# EAGLE board projeto_jcarlos (EAGLE 6.2)
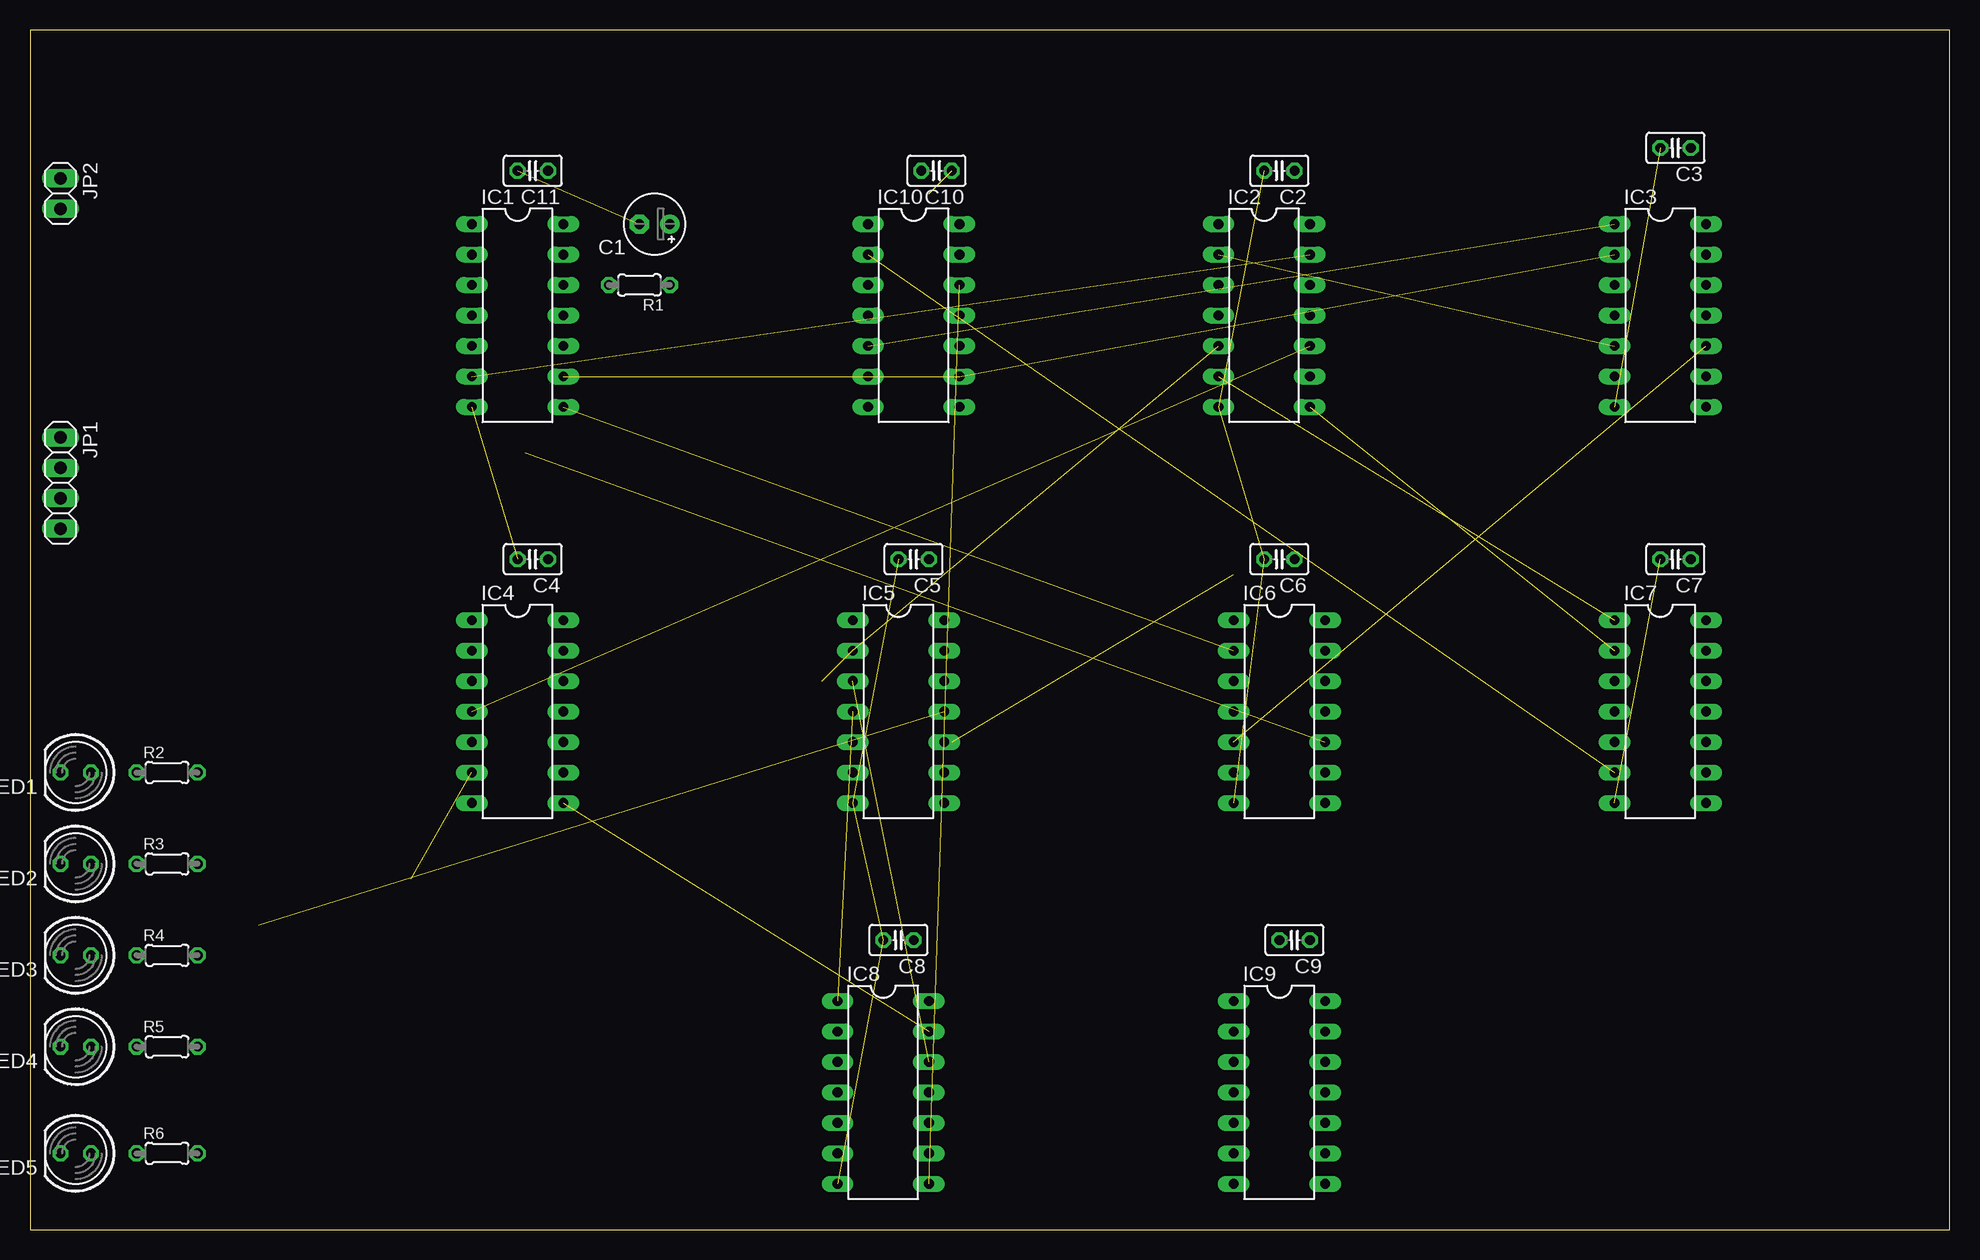
[diagram p0: board, top side]
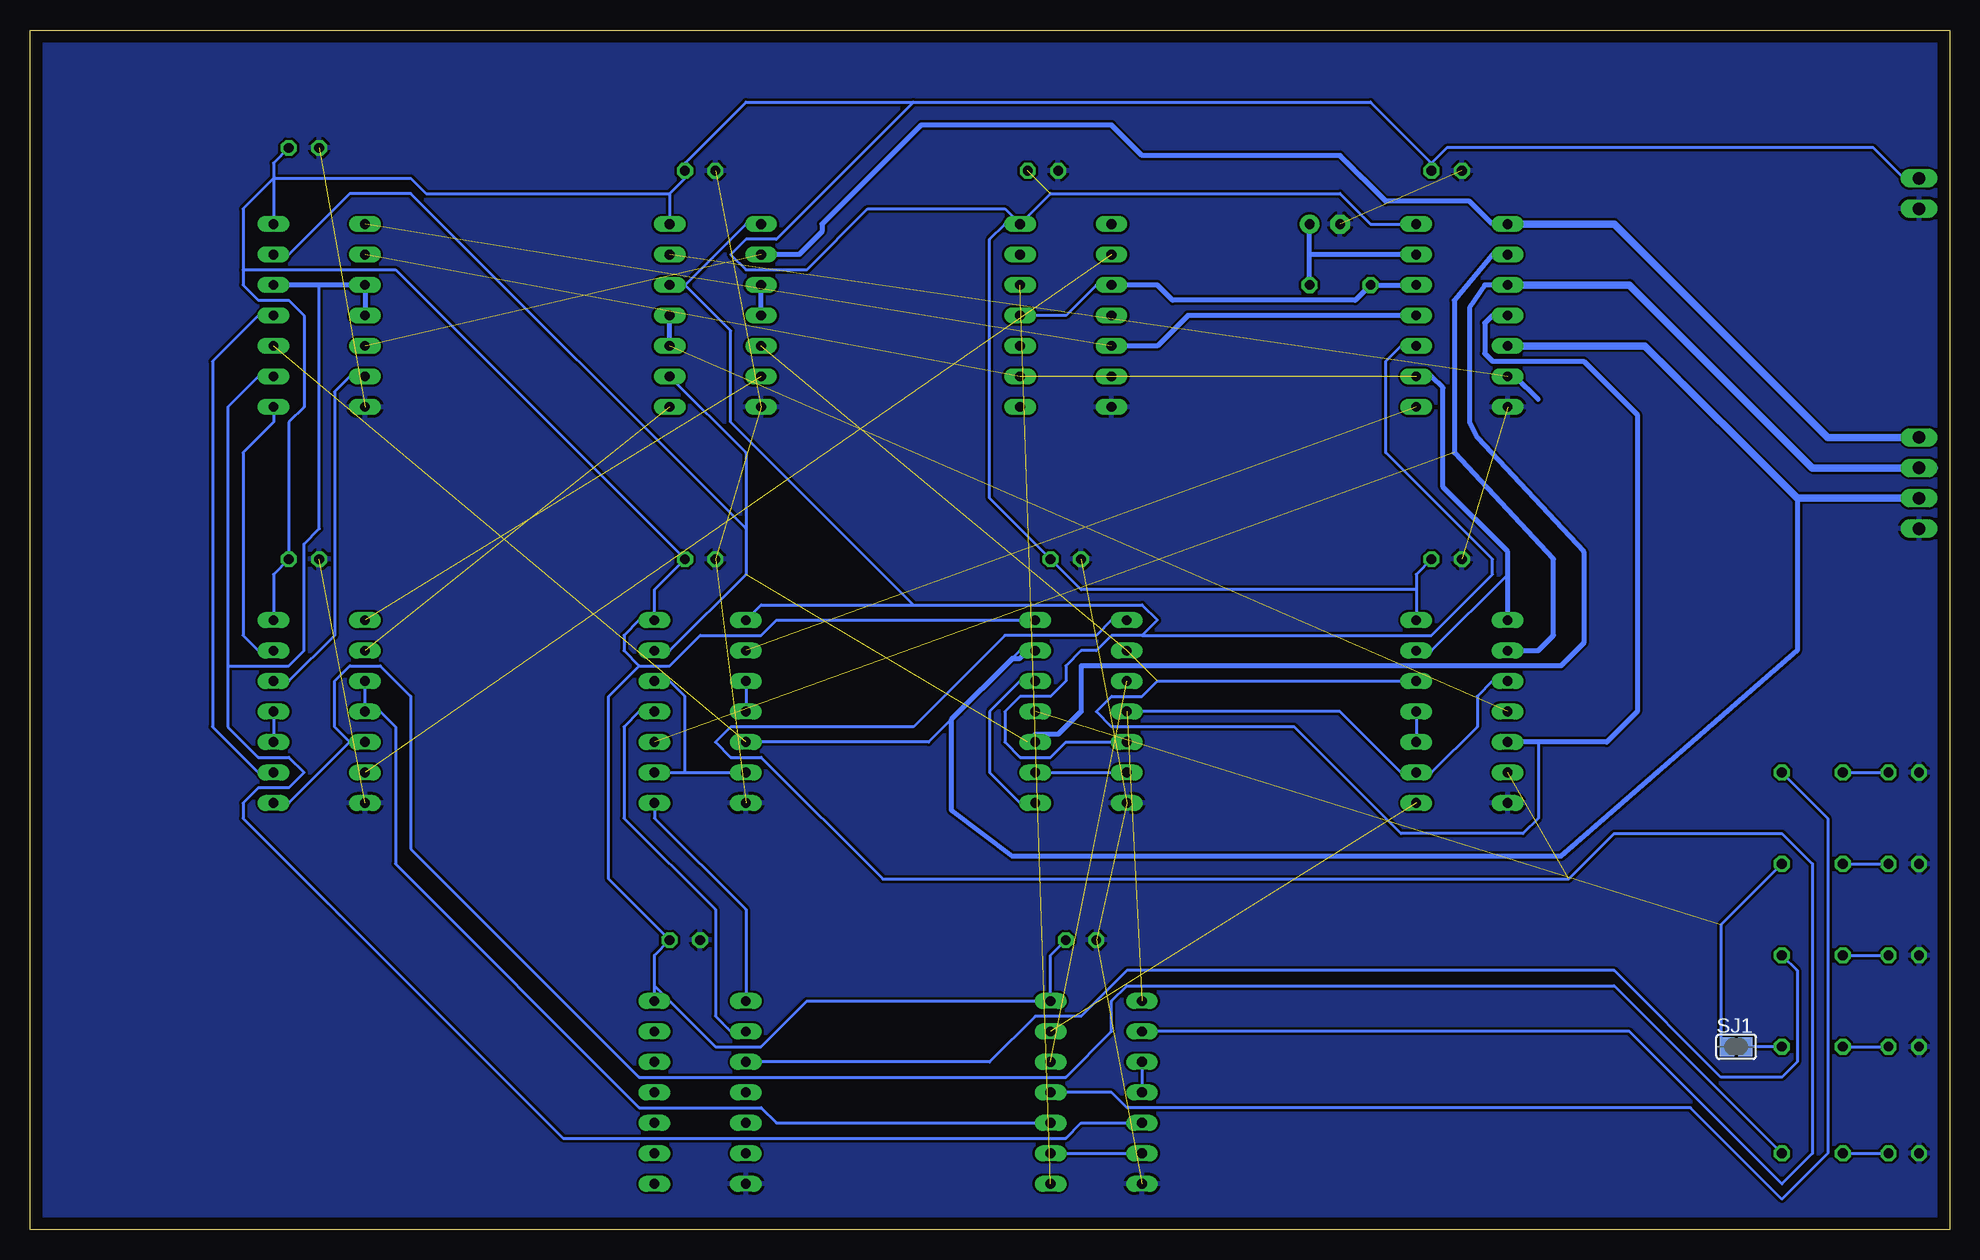
[diagram p1: board, bottom side, seen from below]

Size 160 x 100 mm. Coordinates in mm from the lower left corner, seen from the top.
Outline: 0,0 160,0 160,100 0,100 0,0
Copper layers (1*16): Top 0.035mm / dielectric 1.5mm / Bottom 0.035mm
Design rules: minimum track width 10mil, minimum drill 24mil, track to track 8mil, track to pad 8mil, pad to pad 8mil, via to via 8mil, smd to smd 8mil, copper to edge 40mil, drill to drill 8mil, minimum pad ring 10mil, minimum via ring 8mil, stop-mask expansion 4mil, vias tented up to drill 0mil, thermal gap 10mil

## Footprints (pad centres in the part's own frame; a part is rotated, then mirrored left to right if it is on the bottom)
E2,5-5 = drill 0.813 pad 1.6: + -1.27,0 | drill 0.813 pad 1.6 octagon: - 1.27,0
C025-025X050 = drill 0.813 octagon: 1 -1.27,0; 2 1.27,0
DIL14 = drill 0.813 long: 1 -7.62,-3.81; 2 -5.08,-3.81; 3 -2.54,-3.81; 4 0,-3.81; 5 2.54,-3.81; 6 5.08,-3.81; 7 7.62,-3.81; 8 7.62,3.81; 9 5.08,3.81; 10 2.54,3.81; 11 0,3.81; 12 -2.54,3.81; 13 -5.08,3.81; 14 -7.62,3.81
1X04 = drill 1.016 long: 1 -3.81,0; 2 -1.27,0; 3 1.27,0; 4 3.81,0
1X02 = drill 1.016 long: 1 -1.27,0; 2 1.27,0
LED5MM = drill 0.813 octagon: A -1.27,0; K 1.27,0
0204/5 = drill 0.813 octagon: 1 -2.54,0; 2 2.54,0
SJ = smd 1.168 x 1.6: 1 -0.762,0; 2 0.762,0

## Placement (x,y rotation side)
C1  1uF  [E2,5-5]  52.07,83.82 180 top
C2  0,1uF  [C025-025X050]  104.14,88.27 180 top
C3  0,1uF  [C025-025X050]  137.16,90.17 180 top
C4  0,1uF  [C025-025X050]  41.91,55.88 180 top
C5  0,1uF  [C025-025X050]  73.66,55.88 180 top
C6  0,1uF  [C025-025X050]  104.14,55.88 180 top
C7  0,1uF  [C025-025X050]  137.16,55.88 180 top
C8  0,1uF  [C025-025X050]  72.39,24.13 180 top
C9  0,1uF  [C025-025X050]  105.41,24.13 180 top
C10  0,1uF  [C025-025X050]  75.56,88.27 180 top
C11  0,1uF  [C025-025X050]  41.91,88.27 180 top
IC1  74HCT14N  [DIL14]  40.64,76.2 270 top
IC2  74HC08N  [DIL14]  102.87,76.2 270 top
IC3  74HC08N  [DIL14]  135.89,76.2 270 top
IC4  74HC08N  [DIL14]  40.64,43.18 270 top
IC5  74HC08N  [DIL14]  72.39,43.18 270 top
IC6  74HC08N  [DIL14]  104.14,43.18 270 top
IC7  7432N  [DIL14]  135.89,43.18 270 top
IC8  7432N  [DIL14]  71.12,11.43 270 top
IC9  7432N  [DIL14]  104.14,11.43 270 top
IC10  74S74N  [DIL14]  73.66,76.2 270 top
JP1  [1X04]  2.54,62.23 270 top
JP2  [1X02]  2.54,86.36 270 top
LED1  [LED5MM]  3.81,38.1 180 top
LED2  [LED5MM]  3.81,30.48 180 top
LED3  [LED5MM]  3.81,22.86 180 top
LED4  [LED5MM]  3.81,15.24 180 top
LED5  [LED5MM]  3.81,6.35 180 top
R1  680R  [0204/5]  50.8,78.74 180 top
R2  330R  [0204/5]  11.43,38.1 0 top
R3  330R  [0204/5]  11.43,30.48 0 top
R4  330R  [0204/5]  11.43,22.86 0 top
R5  330R  [0204/5]  11.43,15.24 0 top
R6  330R  [0204/5]  11.43,6.35 0 top
SJ1  [SJ]  17.78,15.24 0 bottom

## Library data of the parts
C1-C11 R1-R6 = rcl
IC1-IC6 = 74xx-eu
IC7-IC10 = 74xx-us
JP1 JP2 = pinhead
LED1-LED5 = led
SJ1 = jumper

## Nets
!E0-: IC1.8 IC6.2
!E1-: IC1.10 IC2.1 IC2.12 IC5.5 IC6.1
!SC: IC1.2 IC4.2 IC6.10
!SM: IC1.4 IC2.5 IC4.5 IC4.12 IC5.2
!SV: IC1.6 IC2.13
+5V: C2.1 C3.1 C4.1 C5.1 C6.1 C7.1 C8.1 C9.1 C10.1 C11.1 IC1.14 IC2.14 IC3.14 IC4.14 IC5.14 IC6.14 IC7.14 IC8.14 IC9.14 IC10.14 JP2.1
A0: IC2.10 IC2.11 IC4.4
A1: IC3.3 IC3.4 IC3.9 IC3.12 IC8.5
AL: IC7.5 IC7.8 R6.2
E0+: IC8.8 IC10.12
E0-: IC1.9 IC3.2 IC4.1 IC4.13 IC10.9
E1+: IC7.6 IC10.2
E1-: IC1.11 IC3.1 IC10.5
GND: C1.- C2.2 C3.2 C4.2 C5.2 C6.2 C7.2 C8.2 C9.2 C10.2 C11.2 IC1.7 IC2.7 IC3.7 IC4.7 IC5.7 IC6.7 IC7.7 IC8.7 IC9.7 IC10.7 JP1.4 JP2.2 LED1.K LED2.K LED3.K LED4.K LED5.K
MA: R5.2 SJ1.2
N$1: IC5.6 IC5.9
N$2: IC7.3 IC7.4 IC8.10
N$3: IC4.10 IC4.11
N$4: IC4.8 IC8.13
N$5: IC8.3 IC8.4
N$6: IC5.3 IC8.12
N$7: C1.+ IC1.13 R1.1
N$8: IC1.12 IC10.3 IC10.11 R1.2
N$9: IC8.6 IC8.9
N$10: IC4.3 IC4.9 IC5.4 IC8.1
N$11: IC5.8 IC5.12
N$12: IC4.6 IC5.1 IC8.2
N$13: IC2.3 IC2.4
N$14: LED1.A R2.1
N$15: IC2.6 IC7.1
N$16: LED2.A R3.1
N$17: LED3.A R4.1
N$18: IC2.8 IC7.2
N$19: IC3.6 IC7.12
N$20: IC3.8 IC7.13
N$21: IC3.11 IC7.9
N$22: IC7.10 IC7.11
N$23: LED4.A R5.1
N$24: LED5.A R6.1
N$27: IC6.3 IC6.4
N$29: IC6.6 IC6.9 IC6.12
N$32: IC6.8 IC9.1
N$33: IC6.11 IC9.2
SC: IC1.1 IC2.2 IC3.5 JP1.1
SM: IC1.3 IC2.9 IC3.13 IC5.10 IC6.13 JP1.2
SV: IC1.5 IC3.10 IC5.13 IC6.5 JP1.3
VA: IC8.11 R2.2
VB: IC5.11 R3.2 SJ1.1
VC: IC9.3 R4.2

## Tracks (layer width: path | path; a pad name or v marks a point on that pad's centre or on a via)
!E0-  (1 unrouted)
!E1-
  Bottom 0.254: IC2.1 100.33,83.82 105.41,78.74 | IC5.5 73.66,40.64 74.93,39.37 77.47,39.37 78.74,40.64 78.74,43.18 77.47,44.45 74.93,44.45 73.66,45.72 73.66,46.99 72.39,48.26 71.12,48.26 69.85,49.53 67.31,49.53 | 67.31,49.53 66.04,50.8 67.31,52.07 86.36,52.07 | 86.36,52.07 99.06,52.07 IC6.1 | IC1.10 45.72,73.66 46.99,72.39 46.99,64.77 38.1,55.88 38.1,54.61 43.18,49.53 67.31,49.53 | 105.41,78.74 101.6,74.93 101.6,67.31 86.36,52.07 | 105.41,78.74 IC2.12
!SC  (1 unrouted)
  Bottom 0.406: IC1.2 38.1,81.28 41.27,77.47 41.27,64.77 33.02,55.88 33.02,49.53 34.29,48.26 IC4.2
!SM  (2 unrouted)
  Bottom 0.254: IC4.12 66.04,45.72 67.31,44.45 69.85,44.45 71.12,43.18 69.85,41.91 54.61,41.91 45.72,33.02 35.56,33.02 34.29,34.29 34.29,40.64
  Bottom 0.406: IC1.4 38.1,76.2 38.73,75.56 38.73,73.03 38.1,72.39 30.48,72.39 26.04,67.94 26.04,43.18 28.57,40.64 34.29,40.64 IC4.5
!SV  (1 unrouted)
  Bottom 0.406: IC1.6 36.2,71.12 34.29,69.22
+5V  (1 unrouted)
  Bottom 0.254: IC5.14 97.79,50.8 99.06,49.53 104.14,49.53 106.68,46.99 109.22,46.99 | 109.22,46.99 110.49,48.26 110.49,49.53 109.22,50.8 IC6.14 107.95,53.34 C6.1 129.54,80.01 142.24,80.01 | C8.1 74.93,22.86 IC8.14 95.25,19.05 99.06,15.24 102.87,15.24 107.95,20.32 | IC9.14 107.95,20.32 | 107.95,20.32 107.95,22.86 C9.1 111.76,29.21 111.76,44.45 109.22,46.99 | IC1.14 48.26,83.82 50.8,86.36 74.93,86.36 IC10.14 | 44.45,53.34 44.45,54.61 C4.1 | 44.45,53.34 IC4.14 | 44.45,53.34 72.39,53.34 C5.1 80.01,60.96 80.01,82.55 78.74,83.82 IC10.14 | 43.18,88.9 41.91,90.17 6.35,90.17 3.81,87.63 JP2.1 | IC7.14 139.7,54.61 C7.1 138.43,67.31 137.16,68.58 137.16,76.2 138.43,77.47 140.97,77.47 142.24,78.74 142.24,80.01 | 106.68,86.36 IC2.14 | 106.68,86.36 105.41,87.63 C2.1 105.41,88.9 100.33,93.98 86.36,93.98 | 139.7,87.63 139.7,88.9 C3.1 | 139.7,87.63 IC3.14 | 106.68,86.36 127,86.36 128.27,87.63 139.7,87.63 | 142.24,80.01 142.24,85.09 139.7,87.63 | 43.18,88.9 48.26,93.98 86.36,93.98 | 43.18,88.9 C11.1 | IC10.14 78.74,85.09 90.17,85.09 95.25,80.01 100.33,80.01 101.6,81.28 100.33,82.55 97.79,82.55 86.36,93.98
A0  (1 unrouted)
  Bottom 0.406: IC2.10 IC2.11
A1
  Bottom 0.254: IC8.5 72.39,8.89 73.66,7.62 115.57,7.62 142.24,34.29 142.24,35.56 140.97,36.83 138.43,36.83 137.16,38.1 138.43,39.37 140.97,39.37 143.51,41.91 143.51,46.99 | 143.51,46.99 143.51,68.58 140.97,71.12 IC3.9 | 135.89,78.74 135.89,58.42 137.16,57.15 137.16,48.26 138.43,46.99 143.51,46.99
  Bottom 0.406: IC3.4 IC3.3 135.89,78.74 IC3.12
AL
  Bottom 0.254: R6.2 27.94,20.32 68.58,20.32 69.85,19.05 69.85,16.51 73.66,12.7 109.22,12.7 128.27,31.75 128.27,44.45 130.81,46.99 133.35,46.99 134.62,45.72 134.62,41.91 133.35,40.64 | IC7.8 138.43,35.56 133.35,40.64 | 133.35,40.64 IC7.5
E0+  (1 unrouted)
E0-  (2 unrouted)
  Bottom 0.254: IC4.13 43.18,48.26 36.83,54.61
  Bottom 0.406: IC4.1 36.83,54.61 36.83,56.52 42.23,61.91 42.23,70.17 43.18,71.12 IC1.9
E1+  (1 unrouted)
E1-  (1 unrouted)
  Bottom 0.406: IC1.11 63.5,76.2 66.04,73.66 IC10.5
GND  (10 unrouted)
  pour Bottom: 0,100.97 161.29,100.97 161.29,-1.27 -1.27,-1.27 -1.27,100.97
MA
  Bottom 0.254: R5.2 SJ1.2
N$1
  Bottom 0.254: IC5.9 IC5.6
N$2
  Bottom 0.254: IC8.10 97.79,8.89 99.06,10.16 109.22,10.16 129.54,30.48 129.54,41.91 130.81,43.18 IC7.4 IC7.3
N$3
  Bottom 0.254: IC4.11 IC4.10
N$4  (1 unrouted)
N$5
  Bottom 0.254: IC8.3 IC8.4
N$6  (1 unrouted)
N$7
  Bottom 0.406: R1.1 53.34,81.28 | 53.34,81.28 C1.+ | IC1.13 53.34,81.28
N$8
  Bottom 0.254: IC10.11 73.66,76.2 71.12,78.74 IC10.3
  Bottom 0.406: IC1.12 R1.2 49.53,77.47 64.77,77.47 66.04,78.74 IC10.3
N$9
  Bottom 0.254: IC8.9 IC8.6
N$10  (1 unrouted)
  Bottom 0.254: IC4.3 38.1,45.72 39.37,44.45 39.37,41.91 43.18,38.1 IC4.9 45.72,38.1 50.8,43.18 IC5.4
N$11
  Bottom 0.254: IC5.8 77.47,35.56 80.01,38.1 80.01,43.18 77.47,45.72 IC5.12
N$12  (1 unrouted)
  Bottom 0.254: IC8.2 26.67,16.51 13.97,3.81 11.43,6.35 11.43,30.48 13.97,33.02 27.94,33.02 31.75,29.21 88.9,29.21 99.06,39.37 101.6,39.37 102.87,40.64 101.6,41.91 86.36,41.91 78.74,49.53 71.12,49.53 69.85,50.8 IC5.1
N$13
  Bottom 0.406: IC2.4 IC2.3
N$14
  Bottom 0.254: R2.1 LED1.A
N$15  (1 unrouted)
N$16
  Bottom 0.254: R3.1 LED2.A
N$17
  Bottom 0.254: R4.1 LED3.A
N$18  (1 unrouted)
N$19
  Bottom 0.254: IC7.12 138.43,45.72 134.62,49.53 134.62,69.85 133.35,71.12 IC3.6
N$20
  Bottom 0.254: IC7.13 140.97,48.26 142.24,49.53 142.24,64.77 139.7,67.31 IC3.8
N$21
  Bottom 0.254: IC7.9 140.97,38.1 144.78,41.91 144.78,72.39 140.97,76.2 IC3.11
N$22
  Bottom 0.254: IC7.11 IC7.10
N$23
  Bottom 0.254: R5.1 LED4.A
N$24
  Bottom 0.254: R6.1 LED5.A
N$27
  Bottom 0.254: IC6.3 IC6.4
N$29
  Bottom 0.254: IC6.9 105.41,38.1 | 105.41,38.1 IC6.6 | IC6.12 106.68,45.72 105.41,44.45 105.41,38.1
N$32
  Bottom 0.254: IC9.1 100.33,26.67 107.95,34.29 IC6.8
N$33
  Bottom 0.254: IC9.2 101.6,16.51 102.87,17.78 102.87,26.67 110.49,34.29 110.49,41.91 109.22,43.18 IC6.11
SC  (1 unrouted)
  Bottom 0.406: IC1.1 38.1,83.82 40.01,85.72 46.99,85.72 50.8,89.53 67.31,89.53 69.85,92.08 85.72,92.08 93.98,83.82 93.98,83.19 95.89,81.28 IC2.2
  Bottom 0.61: JP1.1 10.16,66.04 27.94,83.82 IC1.1
SM  (1 unrouted)
  Bottom 0.254: IC6.13 106.68,48.26 100.33,54.61 100.33,58.42 | 100.33,58.42 100.33,64.77 IC2.9 | IC3.13 138.43,81.28 133.35,86.36 128.27,86.36 100.33,58.42
  Bottom 0.406: IC1.3 38.73,78.74 40.01,76.83 40.01,67.31 39.37,66.04 30.48,56.52 30.48,48.9 32.38,46.99 72.39,46.99 72.39,43.18 74.3,41.27 76.2,41.27 76.83,40.64 IC5.10
  Bottom 0.61: IC1.3 26.67,78.74 11.43,63.5 JP1.2 1.27,63.5
SV  (1 unrouted)
  Bottom 0.254: IC5.13 77.47,48.26 78.74,46.99 | IC6.5 85.09,40.64 82.55,43.18
  Bottom 0.406: 12.7,60.96 12.7,48.26 32.38,31.11 78.11,31.11 83.19,34.92 83.19,42.55 82.55,43.18 78.74,46.99 78.11,47.62 77.47,47.62 76.83,48.26
  Bottom 0.61: JP1.3 12.7,60.96 25.4,73.66 IC1.5
VA
  Bottom 0.254: IC8.11 69.85,11.43 68.58,10.16 21.59,10.16 13.97,2.54 10.16,6.35 10.16,34.29 R2.2
VB  (1 unrouted)
  Bottom 0.254: R3.2 19.05,25.4 19.05,15.24 SJ1.1
VC
  Bottom 0.254: IC9.3 80.01,13.97 76.2,17.78 72.39,17.78 68.58,21.59 27.94,21.59 19.05,12.7 13.97,12.7 12.7,13.97 12.7,21.59 R4.2